# Altium PCB PCBFuelPump.PcbDoc
Units mm, origin at the board's own origin, x right, y up, seen from the top; angles counter-clockwise.
Board outline 57.91 x 77.09 mm, 4 copper layers (SIGT, +HV, GND, SIGB), stack 1.586 mm thick; 23 components, 16 nets, 76 pads, 17 vias.
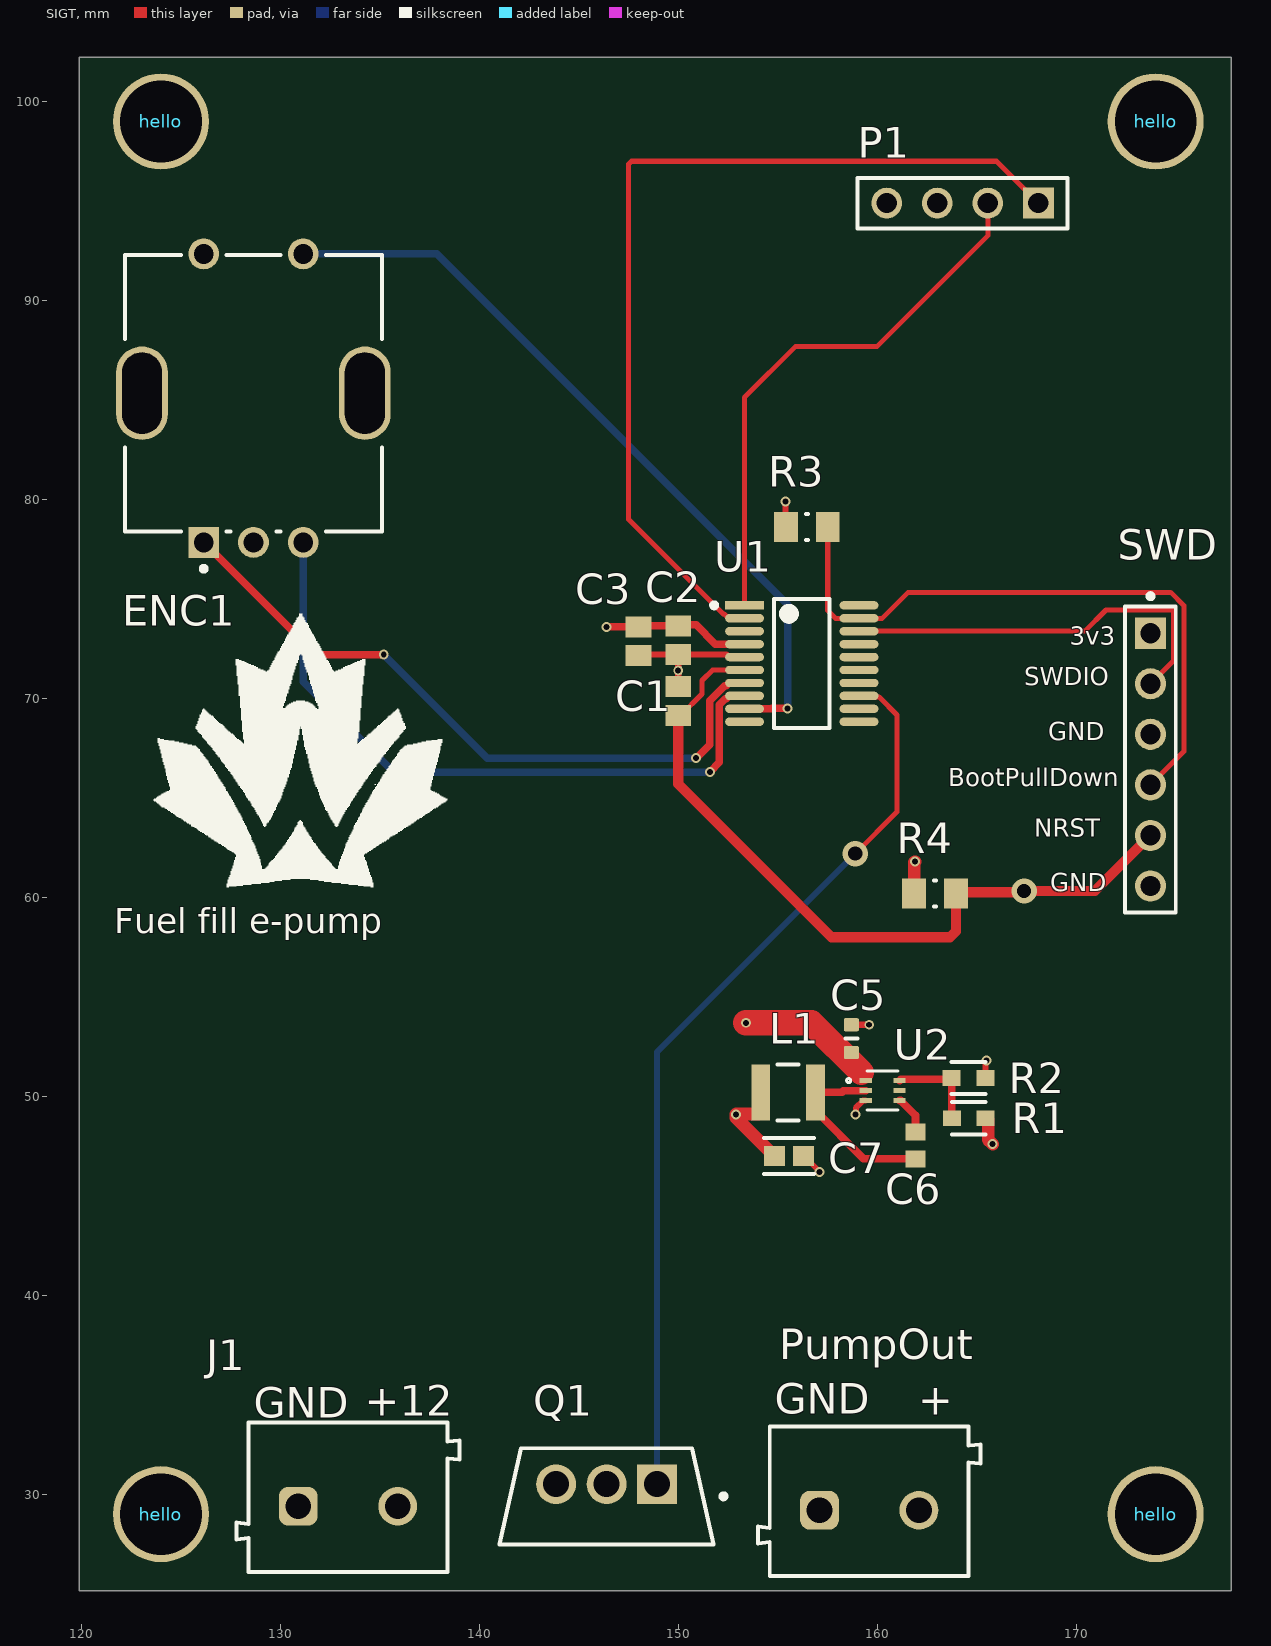
[diagram p0: SIGT view]
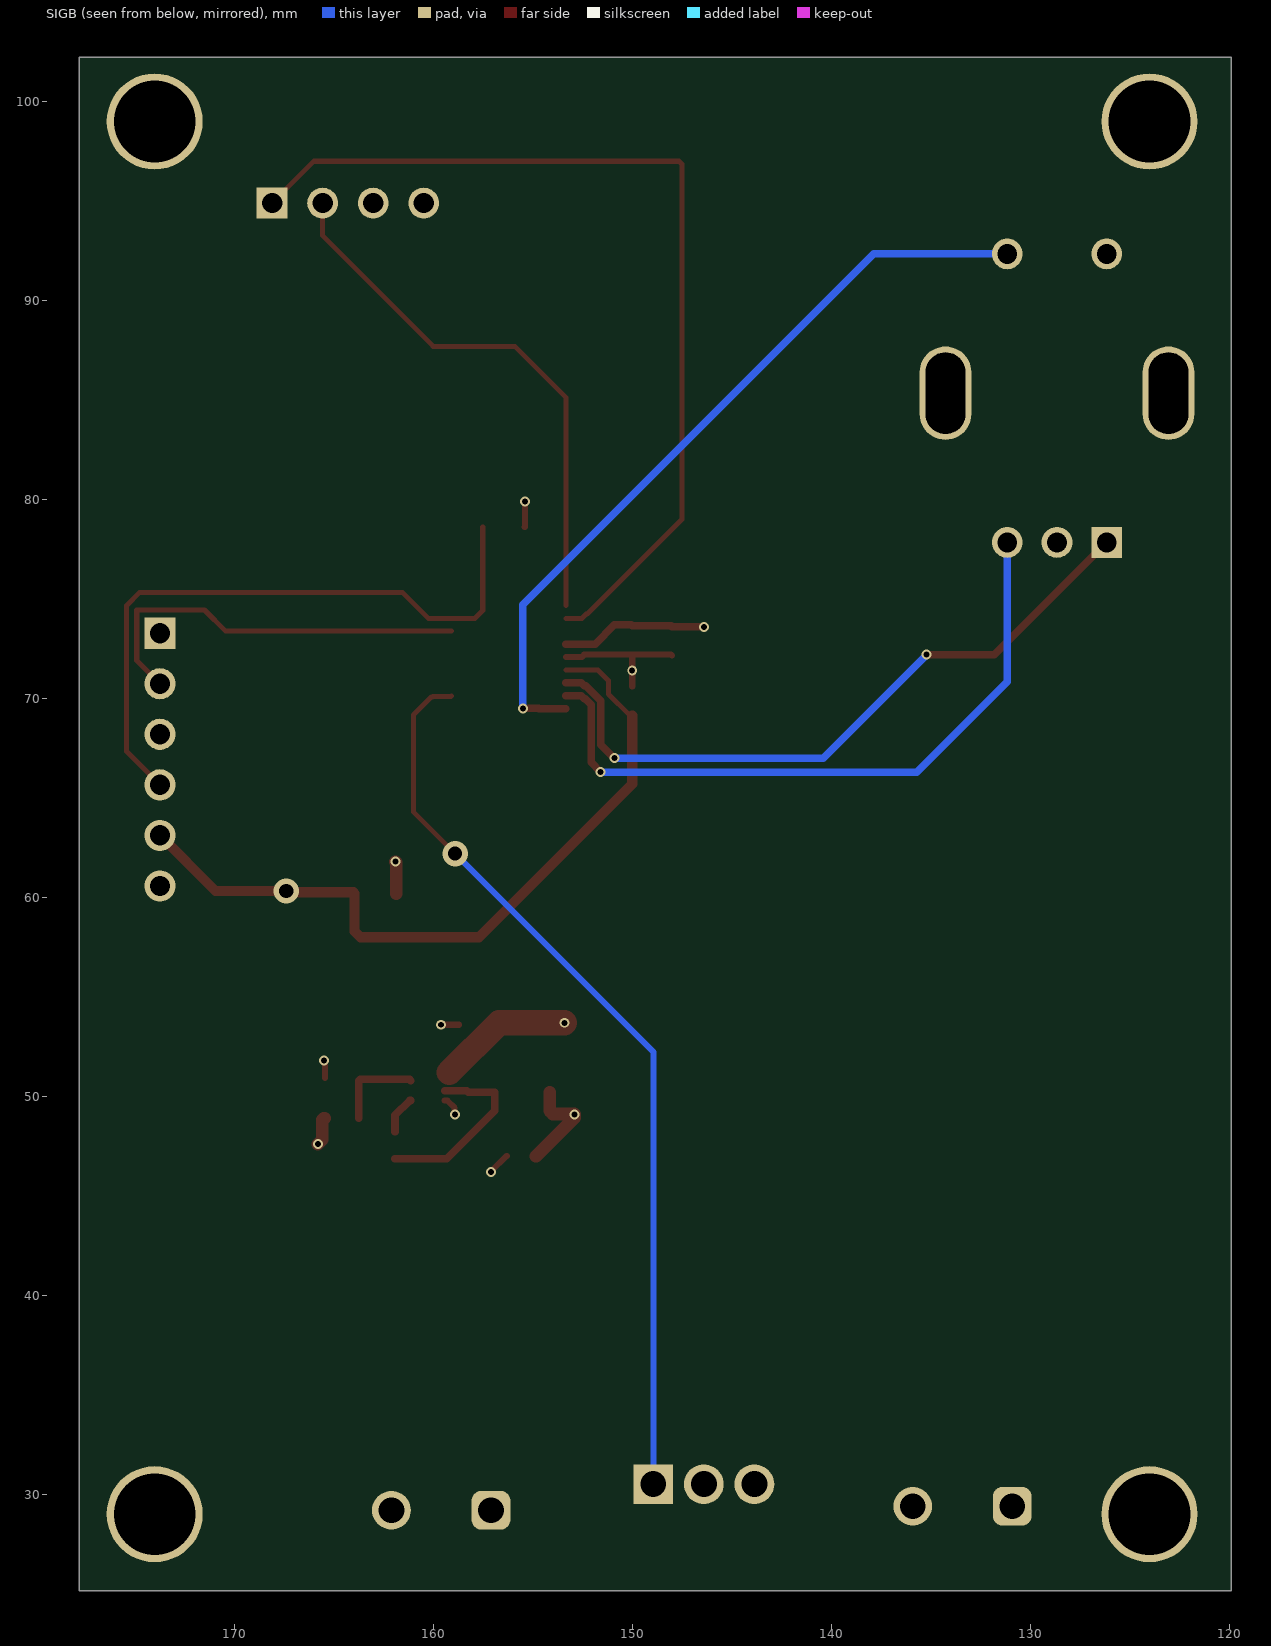
[diagram p1: SIGB view, seen from below]
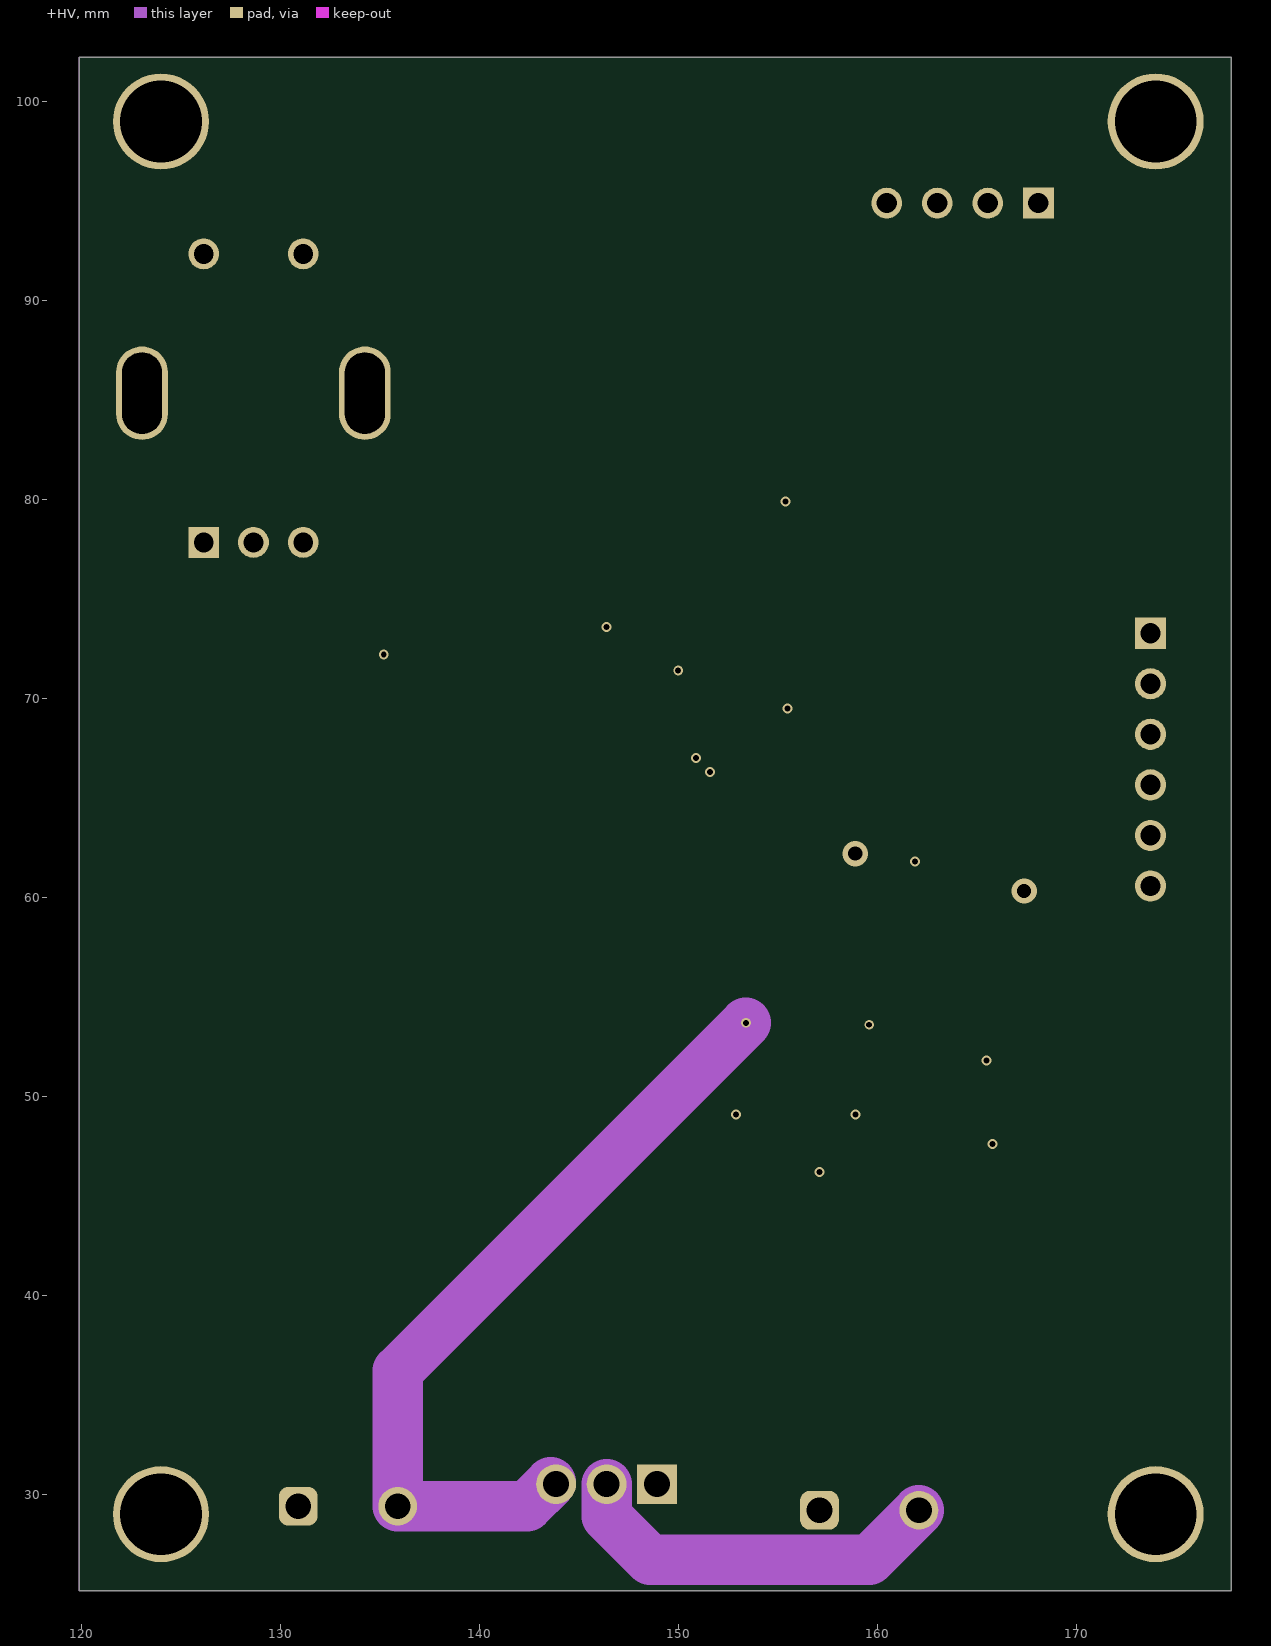
[diagram p2: +HV]
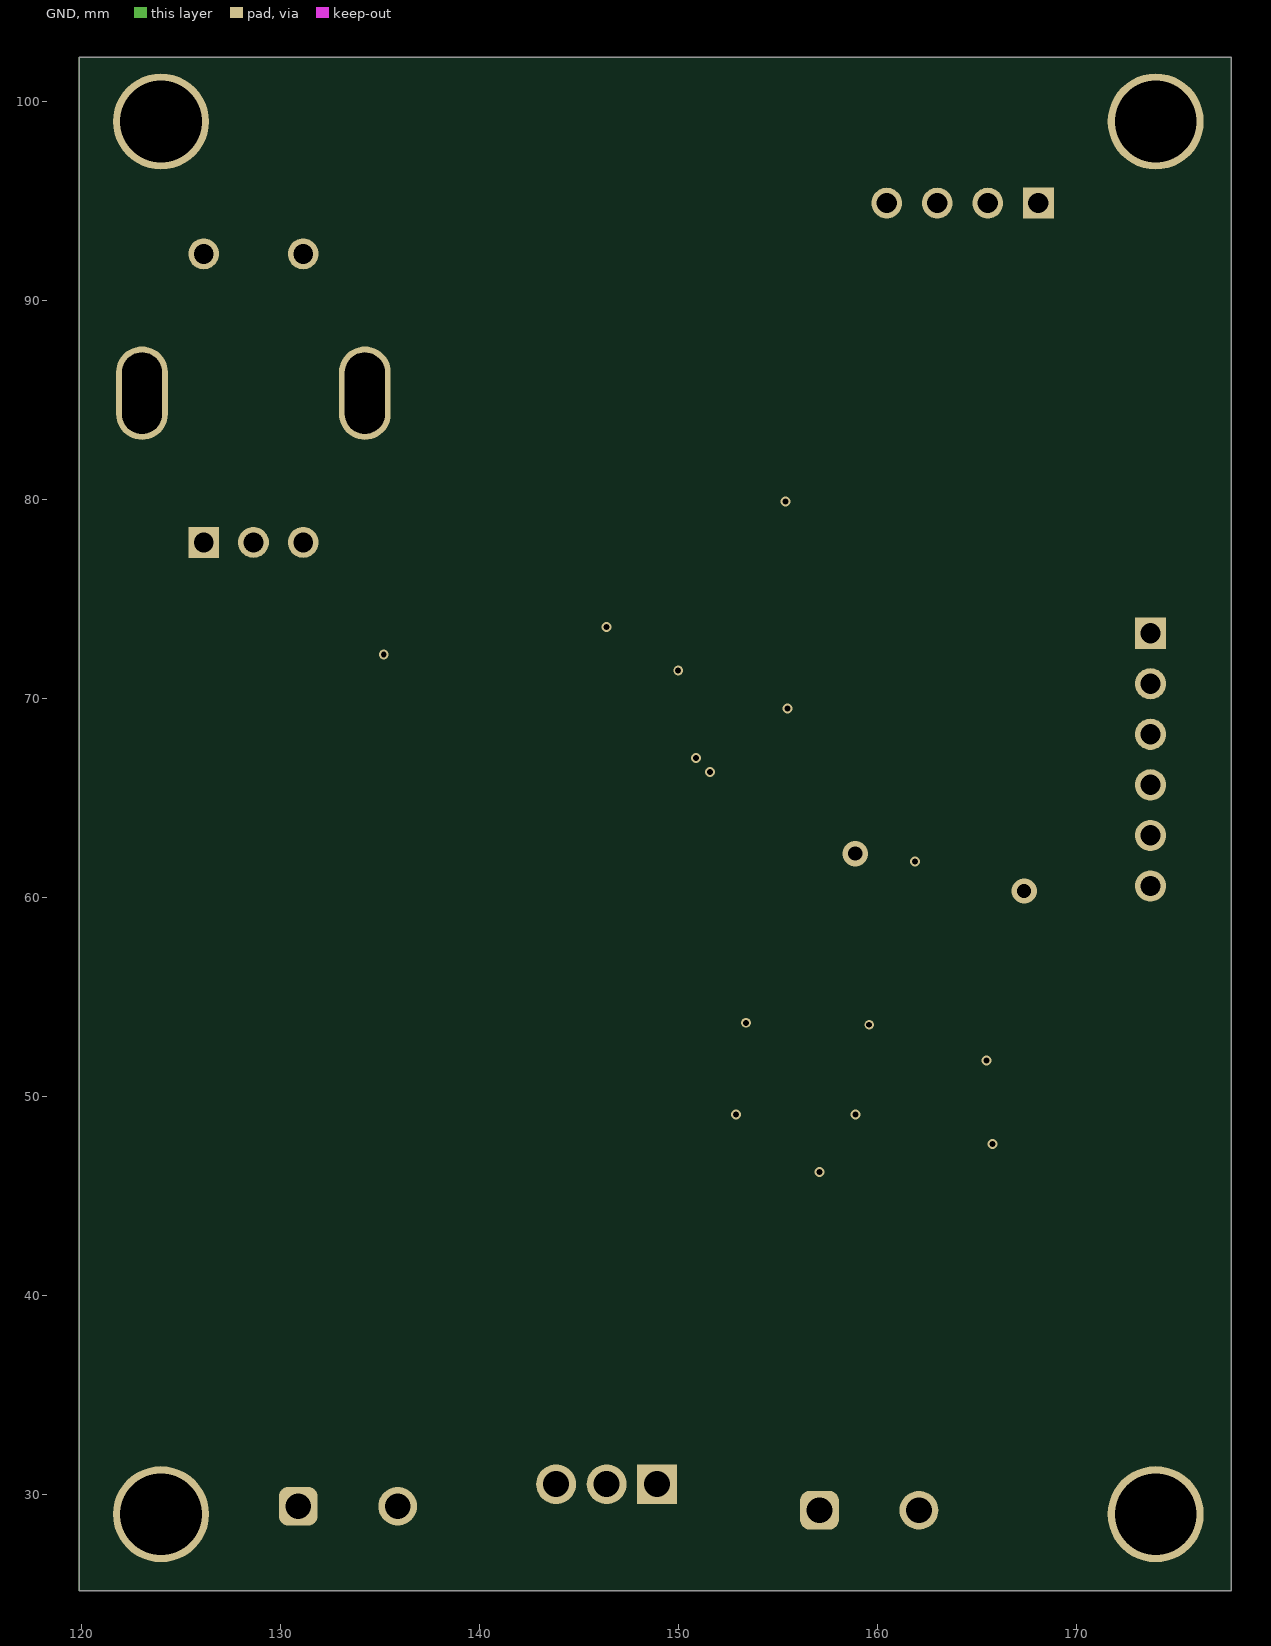
[diagram p3: GND]
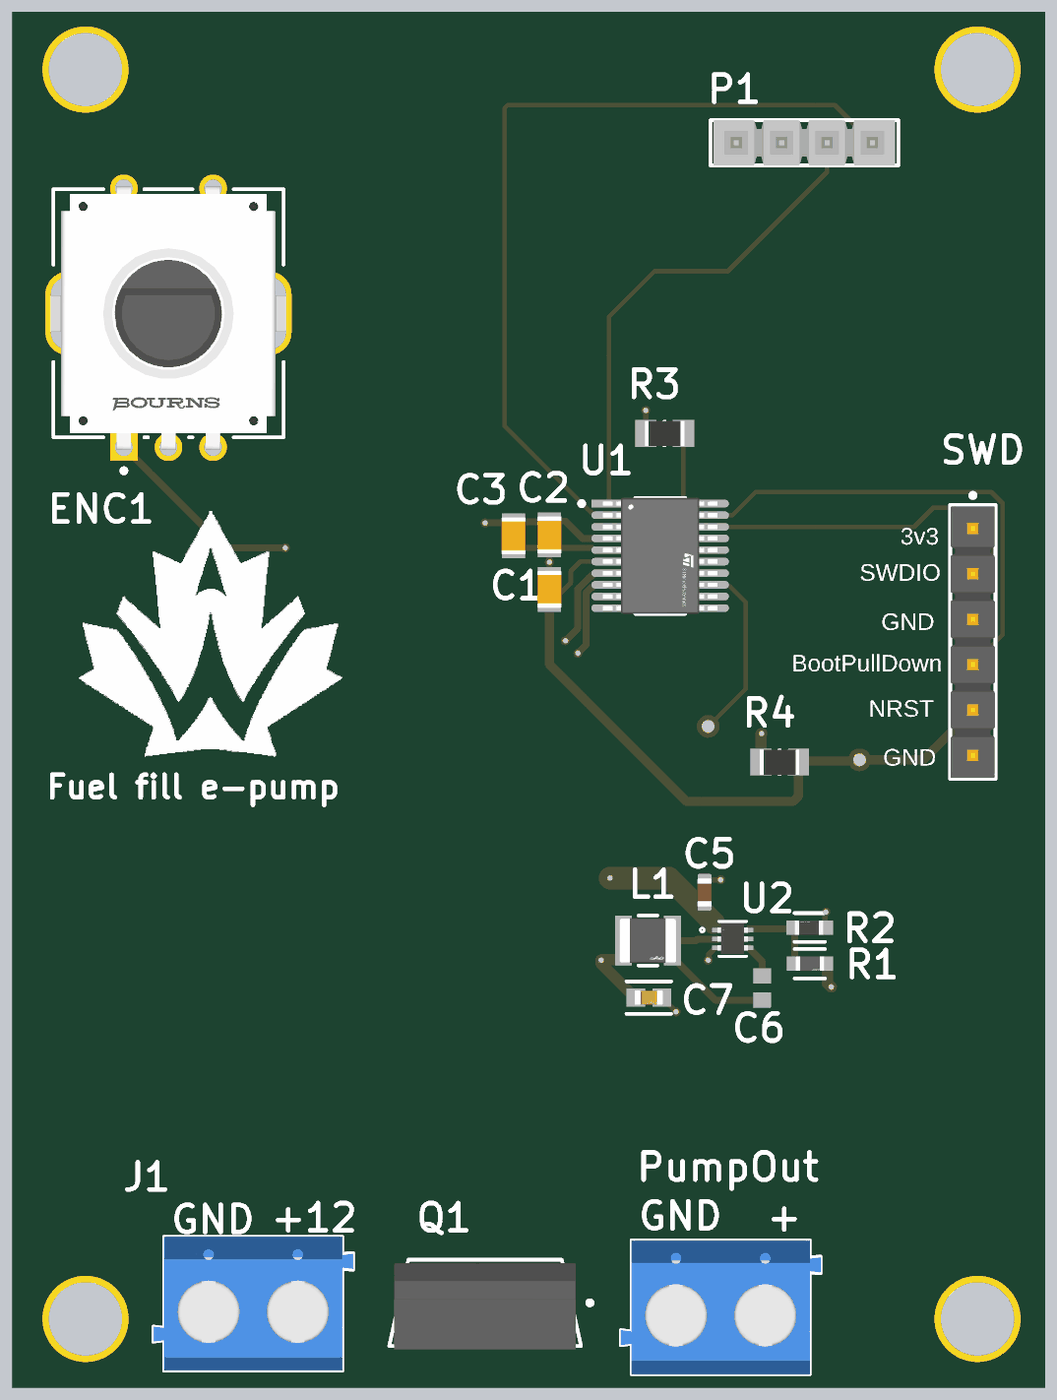
[diagram p4: 3D render of the assembled board from above, using the file's embedded part models]

## Layer stack, top to bottom
Top Solder: solder mask 0.0102, Solder Resist, Dk 3.5
SIGT: signal copper 0.035
Dielectric 2: prepreg 0.2104, JLC-7628, Dk 4.4
+HV: signal copper 0.0152
Dielectric 1: core 1.065, JLC-Core-1, Dk 4.6
GND: signal copper 0.0152
Dielectric 3: prepreg 0.2104, JLC-7628, Dk 4.4
SIGB: signal copper 0.035
Bottom Solder: solder mask 0.0102, Solder Resist, Dk 3.5

## Board outline
119.888,25.146 119.888,102.235 177.8,102.235 177.8,25.146

## Design rules (kind name [scope] priority, off if disabled: settings)
BoardOutlineClearance [All] p1: gap=0.2 ignorepadtopadclearanceinfootprint=FALSE
Clearance [All] p1: gap=0.2 ignorepadtopadclearanceinfootprint=FALSE except(0.1: Arc-Arc Arc-Track Arc-SMDPad Arc-THPad Track-Track Track-SMDPad Track-THPad; 0.15: SMDPad-SMDPad; 0.254: Arc-Text Track-Text SMDPad-Text THPad-Text Via-Text Fill-Text Poly-Text Region-Text Text-Text; 0.28: Arc-Hole Track-Hole SMDPad-THPad SMDPad-Hole THPad-Hole Fill-Hole Poly-Hole Region-Hole Text-Hole; 0.3: THPad-Fill THPad-Poly THPad-Region; 0.45: THPad-THPad THPad-Via)
ComponentClearance [All] p1: gap=0.5 collisioncheckmode=3 verticalgap=0.5 showdistances=FALSE
DiffPairsRouting [All] p1: maxlimit=0.381 minlimit=0.1 mostfreqgap=0.254 toplayer_minwidth=0.1 toplayer_maxwidth=0.381 toplayer_prefwidth=0.254 midlayer1_minwidth=0.1 midlayer1_maxwidth=0.381 midlayer1_prefwidth=0.254 midlayer2_minwidth=0.1 midlayer2_maxwidth=0.381 midlayer2_prefwidth=0.254 bottomlayer_minwidth=0.1 bottomlayer_maxwidth=0.381 bottomlayer_prefwidth=0.254 maxuncoupledlength=12.7
HoleSize [All] p1: absolutevalues=TRUE maxlimit=6.3 minlimit=0.3 maxpercent=80.000 minpercent=20.000
HoleToHoleClearance [All] p1: gap=0.2 allowstackedmicrovias=TRUE
MinimumAnnularRing MinimumAnnularRing_PTH [IsPad And PadIsPlated = 'True'] p1: minimumring=0.18
MinimumAnnularRing [All] p2: minimumring=0.076
MinimumSolderMaskSliver [All] p1: minsoldermaskwidth=0.1
PolygonConnect [All] p1: thpad.connectstyle=Relief thpad.reliefconductorwidth=0.508 thpad.reliefentries=4 thpad.polygonreliefangle="45 Angle" thpad.airgapwidth=0.254 smdpad.connectstyle=Relief smdpad.reliefconductorwidth=0.508 smdpad.reliefentries=4 smdpad.polygonreliefangle="45 Angle" smdpad.airgapwidth=0.254 via.connectstyle=Direct via.reliefconductorwidth=0.508 via.reliefentries=4 via.polygonreliefangle="90 Angle" via.airgapwidth=0.254
RoutingCorners [All] p1: cornerstyle=Round minsetback=2.54 maxsetback=2.54
RoutingVias [All] p1: holewidth=0.3 width=0.45 viastyle="Through Hole" minholewidth=0.3 minwidth=0.45 maxholewidth=6.3 maxwidth=6.45
SilkToSolderMaskClearance [IsPad] p1: minsilkscreentomaskgap=0.15 clearancetoexposedcopper=TRUE
SolderMaskExpansion SolderMaskExpansion_Via [IsVia] p1: expansion=0.102 istentingtop=TRUE
SolderMaskExpansion [All] p2: expansion=0 istentingtop=FALSE
UnRoutedNet [All] p1: checkbadconnections=TRUE
Width [All] p1: maxlimit=2.54 minlimit=0.1 preferedwidth=0.254 checkconnectedcopper=TRUE
22 further rules are at their usual default settings.

## Classes and differential pairs
component class fuelPumpSchematic: C1 C2 C3 C5 C6 C7 ENC1 J1 L1 P1 PumpOut Q1 R1 R2 R3 R4 SWD U1 U2

## Components (designator, comment, footprint, x,y, rotation, side; value= is the part's Value field where it differs from the comment)
C1 "Capacitor 100 nF +/-10% 50 V 0805" CAPC2013X95X50LL10T25 150,69.875 r90 top value=100nF
C2 "Capacitor 100 nF +/-10% 50 V 0805" CAPC2013X95X50LL10T25 150,72.925 r90 top value=100nF
C3 "Capacitor 100 nF +/-10% 50 V 0805" CAPC2013X95X50LL10T25 148,72.875 r90 top value=10uF
C5 "Capacitor 10µF +/-20% 10V 0603" CAPC0603(1608)100_L 158.7,52.9 r270 top value=10µF
C6 "VJ0603Y104KXXAP" CAPC1608X92X38NL15T08 161.925,47.538 r90 top
C7 "GRM186R60J226ME15D" FP-GRM186-0_2-IPC_B 155.575,47 r0 top
ENC1 "PEC12R-4220F-S0024" FP-PEC12R-4220F-S0024-MFG 128.651,85.344 r0 top
hello "MH-M4" MH-M4#1 173.482,97.79 r90 top (schematic designator MH-M7)
hello "MH-M4" MH-M4#2 174.371,28.702 r90 top (schematic designator MH-M6)
hello "MH-M4" MH-M4#3 123.698,28.575 r90 top (schematic designator MH-M5)
hello "MH-M4" MH-M4#4 124.46,98.171 r90 top (schematic designator MH-M4)
J1 "691102710002" 691102710002 133.4,29.85 r0 top
L1 "3.3uH" FP-DFE322520F_D-MFG 155.525,50.2 r0 top
P1 "MTSW-104-07-G-S-170" SMTC-MTSW-104-07-X-S-170 168.1,94.9 r180 top
PumpOut "691102710002" 691102710002 159.6,29.65 r0 top (schematic designator J2)
Q1 "IRF1010EPBF" FP-PG-TO220-3-MFG 146.4,29.9 r270 top
R1 "AC0603FR-0731K6L" FP-AC0603-MFG 164.6,48.9 r0 top
R2 "RT0603BRC0710KL" FP-RT0603-MFG 164.592,50.927 r180 top value=10KΩ
R3 "Resistor 10k +/-1% 0805 125 mW" RESC2013X50X35ML15T15 156.464,78.613 r180 top value=10k
R4 "Resistor 10k +/-1% 0805 125 mW" RESC2013X50X35ML15T15 162.907,60.198 r180 top value=10k
SWD "HTSW-106-07-G-S" FP-HTSW-106-07-G-S-MFG 173.736,66.929 r270 top (schematic designator J3)
U1 "STM32G030F6P6TR" FP-TSSOP20-YA-IPC_A 156.21,71.755 r0 top
U2 "AP62150Z6-7" SOT563_DIO 160.274,50.292 r0 top

## Footprints (in the part's own frame and the unit in brackets; to place one, negate y for a bottom-side part, rotate by r counter-clockwise, add the part's x,y. Pads: shape width x height; smd on the part's side, far side on the other; paste and mask are expansions set on the pad)
691102710002 [mm] "5,00mm - modular - blue - Horizontal entry with pressure clamp - 9,9 mm height - 02p"
  rrect50% 1.95x1.95 hole 1.3: 1(-2.5,-0.45)
  round 1.95 hole 1.3: 2(2.5,-0.45)
  silkscreen extent -5.6,-3.75 5.6,3.75, body extent -5.6,-3.75 5.6,3.75, height 9.96
CAPC0603(1608)100_L [mm] "Chip Capacitor, Body 1.6x0.8mm, Height 1.0mm, IPC High Density"
  rrect25% 0.66x0.76 smd: 1(-0.7,0) 2(0.7,0)
  silkscreen extent 0,-0.3 0,0.3, body extent -0.8,-0.4 0.8,0.4, height 0.95
CAPC1608X92X38NL15T08 [mm] "Chip Capacitor, 2-Leads, Body 1.60x0.80mm, IPC Medium Density"
  rect 0.85x1 smd: 1(-0.675,0) 2(0.675,0)
  body extent -0.87,-0.48 0.87,0.47, height 0.92
CAPC2013X95X50LL10T25 [mm] "Chip Capacitor, 2-Leads, Body 2.10x1.35mm, IPC High Density"
  rect 1.05x1.3 smd: 1(-0.725,0) 2(0.725,0)
  body extent -1.05,-0.67 1.05,0.67, height 0.95
FP-AC0603-MFG [mm]
  rect 0.9x0.8 smd paste+0 mask+0: 1(-0.85,0) 2(0.85,0)
  silkscreen extent -0.85,-0.82 0.85,0.82, body extent -1.4,-0.55 1.4,0.55, height 0.25
FP-DFE322520F_D-MFG [mm]
  rect 0.95x2.8 smd paste+0 mask+0: 1(-1.375,0) 2(1.375,0)
  silkscreen extent -0.53,-1.4 0.53,1.4, body extent -1.95,-1.5 1.95,1.5, height 0.25
FP-GRM186-0_2-IPC_B [mm]
  rect 1.055x1.006 smd paste+0 mask+0: 1(-0.725,0) 2(0.725,0)
  silkscreen extent -1.25,-0.9 1.25,0.9, body extent -1.5,-0.75 1.5,0.75, height 0.25
FP-HTSW-106-07-G-S-MFG [mm]
  rect 1.57x1.57 hole 1.02 paste-2539.97 mask+0: 1(-6.35,0)
  round 1.57 hole 1.02 paste-2539.97 mask+0: 2(-3.81,0) 3(-1.27,0) 4(1.27,0) 5(3.81,0) 6(6.35,0)
  silkscreen extent -8.33,-1.27 7.68,1.27, body extent -7.78,-1.37 7.78,1.37, height 0.25
FP-PEC12R-4220F-S0024-MFG [mm]
  round 1.55 hole 1 paste-2539.97 mask+0: 1(-2.5,7) 2(2.5,7) B(2.5,-7.5) C(0,-7.5)
  rrect100% 2.6x4.7 hole 4.1 slot 2 at 0 deg paste-2539.97 mask+0: 3(-5.6,0) 4(5.6,0)
  rect 1.55x1.55 hole 1 paste-2539.97 mask+0: A(-2.5,-7.5)
  silkscreen extent -6.45,-8.95 6.45,6.95, body extent -7,-8.37 7,7.88, height 0.25
FP-PG-TO220-3-MFG [mm]
  rect 2x2 hole 1.3 paste-2539.97 mask+0: 1(-0.61,2.54)
  round 2 hole 1.3 paste-2539.97 mask+0: 2(-0.61,0) 3(-0.61,-2.54)
  silkscreen extent -2.41,-5.37 2.41,6, body extent -2.51,-5.6 2.51,5.6, height 0.25
FP-RT0603-MFG [mm]
  rect 0.9x0.8 smd paste+0 mask+0: 1(-0.85,0) 2(0.85,0)
  silkscreen extent -0.85,-0.81 0.86,0.8, body extent -1.4,-0.55 1.4,0.55, height 0.25
FP-TSSOP20-YA-IPC_A [mm]
  rect 1.955x0.421 smd paste+0 mask+0: 1(-2.875,2.925)
  rrect100% 1.955x0.421 smd paste+0 mask+0: 2(-2.875,2.275) 3(-2.875,1.625) 4(-2.875,0.975) 5(-2.875,0.325) 6(-2.875,-0.325) 7(-2.875,-0.975) 8(-2.875,-1.625) 9(-2.875,-2.275) 10(-2.875,-2.925) 11(2.875,-2.925) 12(2.875,-2.275) 13(2.875,-1.625) 14(2.875,-0.975) 15(2.875,-0.325) 16(2.875,0.325) 17(2.875,0.975) 18(2.875,1.625) 19(2.875,2.275) 20(2.875,2.925)
  silkscreen extent -4.53,-3.25 1.4,3.25, body extent -4.35,-3.75 4.35,3.75, height 0.25
MH-M4#1 [mil]
  round 190 hole 162: 11(47.64,-20.39)
MH-M4#2 [mil]
  round 190 hole 162: 11(11.73,14.61)
MH-M4#3 [mil]
  round 190 hole 162: 11(16.73,-11.89)
MH-M4#4 [mil]
  round 190 hole 162: 11(32.64,18.11)
RESC2013X50X35ML15T15 [mm] "Chip Resistor, 2-Leads, Body 2.2x1.4mm, IPC Low Density"
  rect 1.2x1.5 smd: 1(-1.05,0) 2(1.05,0)
  silkscreen extent -0.05,-0.65 0.05,0.65, body extent -1.1,-0.7 1.1,0.7, height 0.5
SMTC-MTSW-104-07-X-S-170 [mm] "Assembly .025\" [.64] SQ Post Terminal Strip, 1x4 Pins, Vertical, 2.54mm Pitch, Male"
  rect 1.55x1.55 hole 1.02: 1(0,0)
  round 1.55 hole 1.02: 2(2.54,0) 3(5.08,0) 4(7.62,0)
  silkscreen extent -1.46,-1.27 9.08,1.27, body extent -1.27,-1.27 8.89,1.27, height 6.86
SOT563_DIO [mil]
  rect 24x10 smd paste+0 mask+0: 1(-33.5,19.68) 2(-33.5,0) 3(-33.5,-19.68) 4(33.5,-19.68) 5(33.5,0) 6(33.5,19.68)
  silkscreen extent -71,-38 31,38, body extent -34,-34 34,34, height 24

## Part data
C1 C2 C3: library part CMP-001-00018-6, "Chip Capacitor, 100 nF, +/- 10%, 50 V, 0805 (2012 Metric)", Capacitor Type=Ceramic, Case/Package=0805, Max Operating Temperature=125°C, Min Operating Temperature=-55°C, Tolerance=10%, Voltage Rating=50V, Mounting Technology=SM, Pins=2, RoHS Compliant=True
C5: library part CMP-001-00075-4, "Chip Capacitor, 10µF +/-20%, 10V, 0603, Thickness 1 mm", Case/Package=0603, Max Operating Temperature=85°C, Min Operating Temperature=-55°C, Tolerance=10%, Voltage Rating=10V, Mounting Technology=SMT, Pins=2
C6: library part CMP-2006-01166-1, Capacitance=100nF, Manufacturer=Vitramon, Part Number=VJ0603Y104KXXAP
C7: library part CMP-06035-038491-1, "Chip Multilayer Ceramic Capacitors for General Purpose, 0603, 22uF, X5R, 15%, 20%, 6.3V", Capacitance=22uF, Case Code (Imperial)=0603, Case Code (Metric)=1608, Dielectric=X5R, Max Operating Temperature=85°C, Min Operating Temperature=-55°C, Tolerance=20%, Voltage Rating=6.3V, Case/Package=0603, Length=0.063inch, Mount="Surface Mount", Packaging="Tape and Reel", Thickness=0.028inch, Voltage Rating (DC)=6.3V, Width=0.031inch
ENC1: library part CMP-07421-000021-1, "ROTARY ENCODER MECHANICAL 24PPR", Max Operating Temperature=70°C, Max Supply Voltage (DC)=5V, Min Operating Temperature=-30°C, Package Quantity=150, Built in Switch=Yes, Detent=Yes, Encoder Type=Mechanical, Height=13.4mm, Hole Diameter=2mm, Length=26mm, Mount="Through Hole", Number of Channels=2, Orientation=Vertical, Output Type=Quadrature, Packaging=Bulk, Pulses per Revolution=24, REACH SVHC="No SVHC", RoHS Compliant=Yes, Series=PEC12R, Termination="PC Pin", Width=12.5mm
hello hello hello hello: library part CMP-012-000000-1, "4.1mm not plated hole", Design Item ID=MH-M4, Source=SamiSchLib.SchLib
J1 PumpOut: library part CMP-1502-03258-3, "102 Series 5MM Pitch Straight, Pcb Terminal Block, Through Hole, 2 Way", Color=Blue, Current=15A, Max Operating Temperature=105°C, Min Operating Temperature=-40°C, Voltage=300V, Contact Material=Brass, Contact Plating=Tin, Current Rating=15A, Height=13.4mm, Housing Material=Nylon, Lead Pitch=5mm, Length=7.5mm, Mount="Through Hole", Number of Contacts=2, Number of Levels=1, Number of Pins=2, Number of Positions Per Level=2, Packaging=Box, Pitch=5.0038mm, Plating=Steel, RoHS=Compliant, Stripping Length=-6mm, Termination=Screw, Voltage Rating=300V, Width=11.2mm, Wire Gauge (Max)=22AWG, Wire Gauge (Min)=14AWG, Wire/Cable Gauge=22AWG
L1: library part CMP-06042-016325-1, "FIXED IND 3.3UH 4200MA INFOTNMNT"
P1: library part CMP-1024-00104-1, "Modified .025\" SQ Post Header, Through-hole, Vertical, -55 to 125 degC, 2.54 mm Pitch, 4-Pin, Male, RoHS", Manufacturer=Samtec, Temperature Range="-55 to 125 degC", ComponentLink1Description="Manufacturer URL", ComponentLink1URL=http://www.samtec.com, ComponentLink2Description=Datasheet, ComponentLink2URL=http://www.samtec.com/documents/webfiles/pdf/MTSW.PDF, ComponentLink3Description="Package Specification", ComponentLink3URL=http://www.samtec.com/documents/webfiles/cpdf/MTSW-XXX-XX-X-X-XXXX-XX-XXX-MKT1.pdf, DatasheetVersion=F-214, Mounting Technology=Through-hole, Orientation=Vertical, PackageDescription="Assembly .025\" [.64] SQ Post Terminal Strip", PackageReference=MTSW-104-07-X-S-170, PackageVersion="BI, 2/1987", PartNumber=MTSW-104-07-G-S-170, Pitch="2.54 mm", RoHS=True
Q1: library part CMP-32901-000559-1, "MOSFET N-CH 60V 84A TO-220AB", Case/Package=TO-220, Continuous Drain Current (ID)=84A, Drain to Source Breakdown Voltage=60V, Drain to Source Resistance=12mR, Gate to Source Voltage (Vgs)=20V, Input Capacitance=3.21nF, Max Operating Temperature=175°C, Max Power Dissipation=200W, Min Operating Temperature=-55°C, Threshold Voltage=4V, Contact Plating=Tin, Drain to Source Voltage (Vdss)=60V, Element Configuration=Single, Halogen Free="Not Halogen Free", Height=0.65inch, Lead Free="Lead Free", Length=0.42inch, Max Dual Supply Voltage=60V, Mount="Through Hole", Number of Pins=3, Packaging=Rail/Tube, Power Dissipation=200W, Rds On Max=12mR, REACH SVHC="No SVHC", Rise Time=78ns, RoHS Compliant=Yes, Turn-Off Delay Time=48ns, Turn-On Delay Time=12ns, Width=0.19inch
R1: library part CMP-03412-010593-2, "RES 31.6KΩ 1.00% 0.1W 0603", Case Code (Imperial)=0603, Case Code (Metric)=1608, Max Operating Temperature=155°C, Max Power Dissipation=100mW, Min Operating Temperature=-55°C, Resistance=31.6kR, Resistor Type="Thick Film", Temperature Coefficient=100ppm/°C, Tolerance=1%, Voltage Rating=50V, Case/Package=0603, Features="Moisture Resistant", Height=0.022inch, Length=0.063inch, Number of Terminations=2, Packaging="Tape and Reel", Power Rating=100mW, RoHS Compliant=Yes, Series=AC, Termination=SMD/SMT, Weight=7.1E-05oz, Width=0.8mm
R2: library part CMP-03412-009989-1, "RES SMD 10K OHM 0.1% 1/10W 0603", Manufacturer=Yageo, Package=RT0603, Power Rating=0.1W, Resistance=10KΩ, Temperature="-55°C to +155°C", Temperature Coefficient="15 ppm/°C", Temperature Range High=+155°C, Temperature Range Low=-55°C, Tolerance=0.001, Voltage Rating=75V, Automotive=No, Category=Res, ComponentLink2Description=Datasheet, ComponentLink2URL=http://www.yageo.com/documents/recent/PYu-RT_1-to-0.01_RoHS_L_9.pdf, Composition="Thin Film", Device Class L1="Passive Components", Device Class L2=Resistors, Device Class L3="Chip SMD Resistors", Digikey Description="RES SMD 10K OHM 0.1% 1/10W 0603", Footprint Url=http://www.yageo.com/exep/pages/download/literatures/PYu-R_Mount_10.pdf, Height=0.55mm, Ipc Land Pattern Name=RESC16080X45, Lead Free=Yes, Manufacturer Part Number=RT0603BRC0710KL, Mouser Description="Res Thin Film 0603 10K Ohm 0.1% 1/10W ±15ppm/°C Molded SMD Paper T/R", Octopart=https://octopart.com/rt0603brc0710kl-yageo-20648660, RoHS=TRUE, Series=RT
R3 R4: library part CMP-009-00018-5, "Chip Resistor, 10 KOhm, +/- 1%, 125 mW, -55 to 155 degC, 0805 (2012 Metric)", Case/Package=0805, Max Operating Temperature=155°C, Min Operating Temperature=-55°C, Power=125mW, Tolerance=1%, Voltage Rating=150V, Mounting Technology=SM, Pins=2, RoHS Compliant=True
SWD: library part CMP-02766-001515-1, "CONN HEADER VERT 6POS 2.54MM", Color=Natural, Flammability Rating="UL94 V-0", Max Current Rating=7.6A, Max Operating Temperature=125°C, Max Voltage Rating (AC)=550V, Min Operating Temperature=-55°C, Connector Type=Header, Contact Finish - Mating=GOLD, Contact Material=Bronze, Contact Mating Length=0.23inch, Contact Plating=Gold, Contact Shape=Square, Contact Type="Male Pin", Depth=2.48mm, Fastening Type=Pull, Gender=Male, Housing Color=Natural, Housing Material=Polymer, Insulation Color=Natural, Insulation Material=Polymer, Lead Free="Lead Free", Length=15.24mm, Mount="Through Hole", Number of Contacts=6, Number of Positions=6, Number of Rows=1, Orientation=Straight, Packaging=Rail/Tube, Pitch=0.1inch, Radiation Hardening=No, REACH SVHC="No SVHC", RoHS Compliant=Yes, Series=HTSW, Termination=Solder
U1: library part CMP-12105-000113-1, "IC MCU 32BIT 32KB FLASH 20TSSOP", RoHS Compliant=Yes
U2: "Description", Manufacturer_Name="Diodes Inc", Copyright="Copyright (C) 2025 Ultra Librarian. All rights reserved.", Manufacturer_Part_Number=AP62150Z6-7, RefDes=RefDes, Type=Type

## Via types
v1: diameter 0.5, hole 0.3, SIGT to SIGB, tented both sides, 15 vias
v2: diameter 1.27, hole 0.711, SIGT to SIGB, tented both sides, 2 vias

## Nets (pads, with @x,y where several pads share a name; then routed paths per layer and width w, separated by ;. In a path a pad name is that pad's centre, name@x,y a point inside that pad or via, vN(x,y) a via of type N, cw(c..) or ccw(c..) an arc to the next point about the centre after c; other vN are vias at no path point)
3V3: C2.2 C3.2 C7.1 L1.1 P1.3 R1.2 R4.2 SWD.1 U1.4 | length 15.6
  SIGT w0.381: v1(146.4,73.6) C3.2 148.05,73.65 C2.2 150.05,73.7 150.9,73.7 151.87,72.73 U1.4
  SIGT w0.635: L1.1 154.15,49.275 153.992,49.118 152.917,49.118 v1(152.9,49.1) 152.9,48.925 154.825,47 C7.1 ; R4.2 161.857,61.757 v1(161.9,61.8) ; R1.2 165.5,48.9 165.583,48.817 165.583,47.817 v1(165.8,47.6)
+12: C5.2 J1.2 Q1.3 U2.1 | length 46.6
  SIGT w1.27: v1(153.4,53.7) 156.7,53.7 159.2,51.2
  +HV w2.54: Q1.3@143.6,30.6 142.4,29.4 J1.2 135.9,36.2 v1(153.4,53.7)
BootPullDown: R3.1 SWD.4 U1.19 | length 32.8
  SIGT w0.254: R3.1 157.514,74.422 157.906,74.03 U1.19 160.249,74.03 161.555,75.336 174.752,75.336 175.412,74.676 175.412,67.335 SWD.4
FB: R1.1 R2.2 U2.6 | length 4.6
  SIGT w0.381: U2.6 161.188,50.855 163.67,50.855 163.746,50.78 163.746,48.904 R1.1
GND: C1.2 C2.1 C3.1 C5.1 C7.2 ENC1.1 ENC1.C J1.1 P1.4 PumpOut.1 R2.1 R3.2 SWD.3 SWD.6 U1.5 U2.3 | length 12.2
  SIGT w0.305: C3.1 148.05,72.2 C2.1 ; C1.2 v1(150,71.4) C2.1 ; U1.5 152.536,72.08 152.416,72.2 C2.1 ; v1(155.4,79.9) 155.4,78.627 R3.2 ; C7.2 156.325,47 157.1,46.225 v1(157.1,46.2) ; C5.1 v1(159.6,53.6) ; v1(158.9,49.1) 158.928,49.128 158.928,49.424 159.296,49.792 U2.3 ; R2.1 165.442,51.742 v1(165.5,51.8)
mosfetDrive: Q1.1 U1.13 | length 46
  SIGT w0.254: v2(158.9,62.2) 161,64.3 161,69.169 160.098,70.071 160.029,70.071 160.003,70.098 159.117,70.098 U1.13
  SIGB w0.305: Q1.1 148.94,52.24 v2(158.9,62.2)
NetC6_2: C6.2 U2.4 | length 1.9
  SIGT w0.381: U2.4 161.176,49.792 161.925,49.043 C6.2
NRST: C1.1 R4.1 SWD.5 U1.6 | length 38.2
  SIGT w0.254: C1.1@150.125,69.15 151.2,70.225 151.2,70.9 151.73,71.43 U1.6
  SIGT w0.508: C1.1 150,65.7 157.7,58 163.659,58 163.957,58.298 R4.1 164.02,60.261 167.322,60.261 v2(167.386,60.325) 170.942,60.325 SWD.5
PA0A: ENC1.A U1.7 | length 34.5
  SIGT w0.381: ENC1.A 131.795,72.2 v1(135.2,72.2) ; v1(150.9,67) 151.585,67.685 151.585,69.887 152.33,70.631 152.407,70.631 152.557,70.78 U1.7
  SIGB w0.381: v1(135.2,72.2) 140.4,67 v1(150.9,67)
PA1B: ENC1.B U1.8 | length 34.4
  SIGT w0.381: v1(151.6,66.3) 151.6,66.319 152.066,66.785 152.066,69.687 152.36,69.981 152.407,69.981 152.557,70.13 U1.8
  SIGB w0.381: ENC1.B 131.151,70.849 135.7,66.3 v1(151.6,66.3)
PA2Button: ENC1.2 U1.9 | length 39
  SIGT w0.381: U1.9 153.342,69.488 154.691,69.488 154.703,69.5 v1(155.5,69.5)
  SIGB w0.381: ENC1.2 137.856,92.344 155.5,74.7 v1(155.5,69.5)
pwm12Output: PumpOut.2 Q1.2 | length 19.3
  +HV w2.54: Q1.2 146.4,28.895 148.594,26.701 159.601,26.701 PumpOut.2
SCL: P1.2 U1.1 | length 27.7
  SIGT w0.254: U1.1 153.335,85.135 155.9,87.7 160,87.7 165.56,93.26 P1.2
SDA: P1.1 U1.2 | length 47.9
  SIGT w0.254: U1.2 152.522,74.03 152.311,74.241 152.264,74.241 147.5,79.006 147.5,96.851 147.649,97 166,97 P1.1@168.515,94.485
SW: C6.1 L1.2 U2.2 | length 9.5
  SIGT w0.381: U2.2 159.406,50.274 158.307,50.274 158.232,50.2 L1.2 156.9,49.275 159.312,46.863 C6.1
SWDIO: SWD.2 U1.18 | length 20.4
  SIGT w0.254: U1.18 170.436,73.38 171.501,74.445 174.902,74.445 174.902,71.905 SWD.2
pads on no net: ENC1.3 ENC1.4 hello.11 U1.3 U1.10 U1.11 U1.12 U1.14 U1.15 U1.16 U1.17 U1.20 U2.5

## Polygon pours and split planes (outlines as drawn)
GND on GND "NONET_L03_P002" (solid, shelved, pour order 2): 119.888,25.146 119.888,102.235 177.8,102.235 177.8,25.146
3V3 on +HV "NONET_L02_P005" (solid, shelved, pour order 5): 119.888,25.146 119.888,102.235 177.8,102.235 177.8,25.146

## Silkscreen, mask and mechanical layers (free items; w line width, h text height)
Top Overlay:
  drawing of 5 lines, arcs and shapes, not listed
  text "3v3" at 169.672,72.39 h1.52
  text "SWDIO" at 167.386,70.358 h1.52
  text "GND" at 168.6,67.6 h1.52
  text "BootPullDown" at 163.576,65.278 h1.52
  text "NRST" at 167.894,62.738 h1.52
  text "GND" at 168.7,60 h1.52
  text "Fuel fill e-pump" at 121.666,58.208 h1.27
  text "GND" at 154.854,34.054 h1.52
  text "+" at 162.054,34 h1.52
  text "+12" at 134.254,33.954 h1.52
  text "GND" at 128.654,33.854 h1.52